# Altium PCB classyTKL_EC.PcbDoc (part 2 of 2)
Units mm, origin at the board's own origin, x right, y up, seen from the top; angles counter-clockwise.
Board outline 346.59 x 122.85 mm, 4 copper layers (Top Layer, Int1, Int2, Bottom Layer), stack 1.369 mm thick; 156 components, 68 nets, 789 pads, 1245 vias.
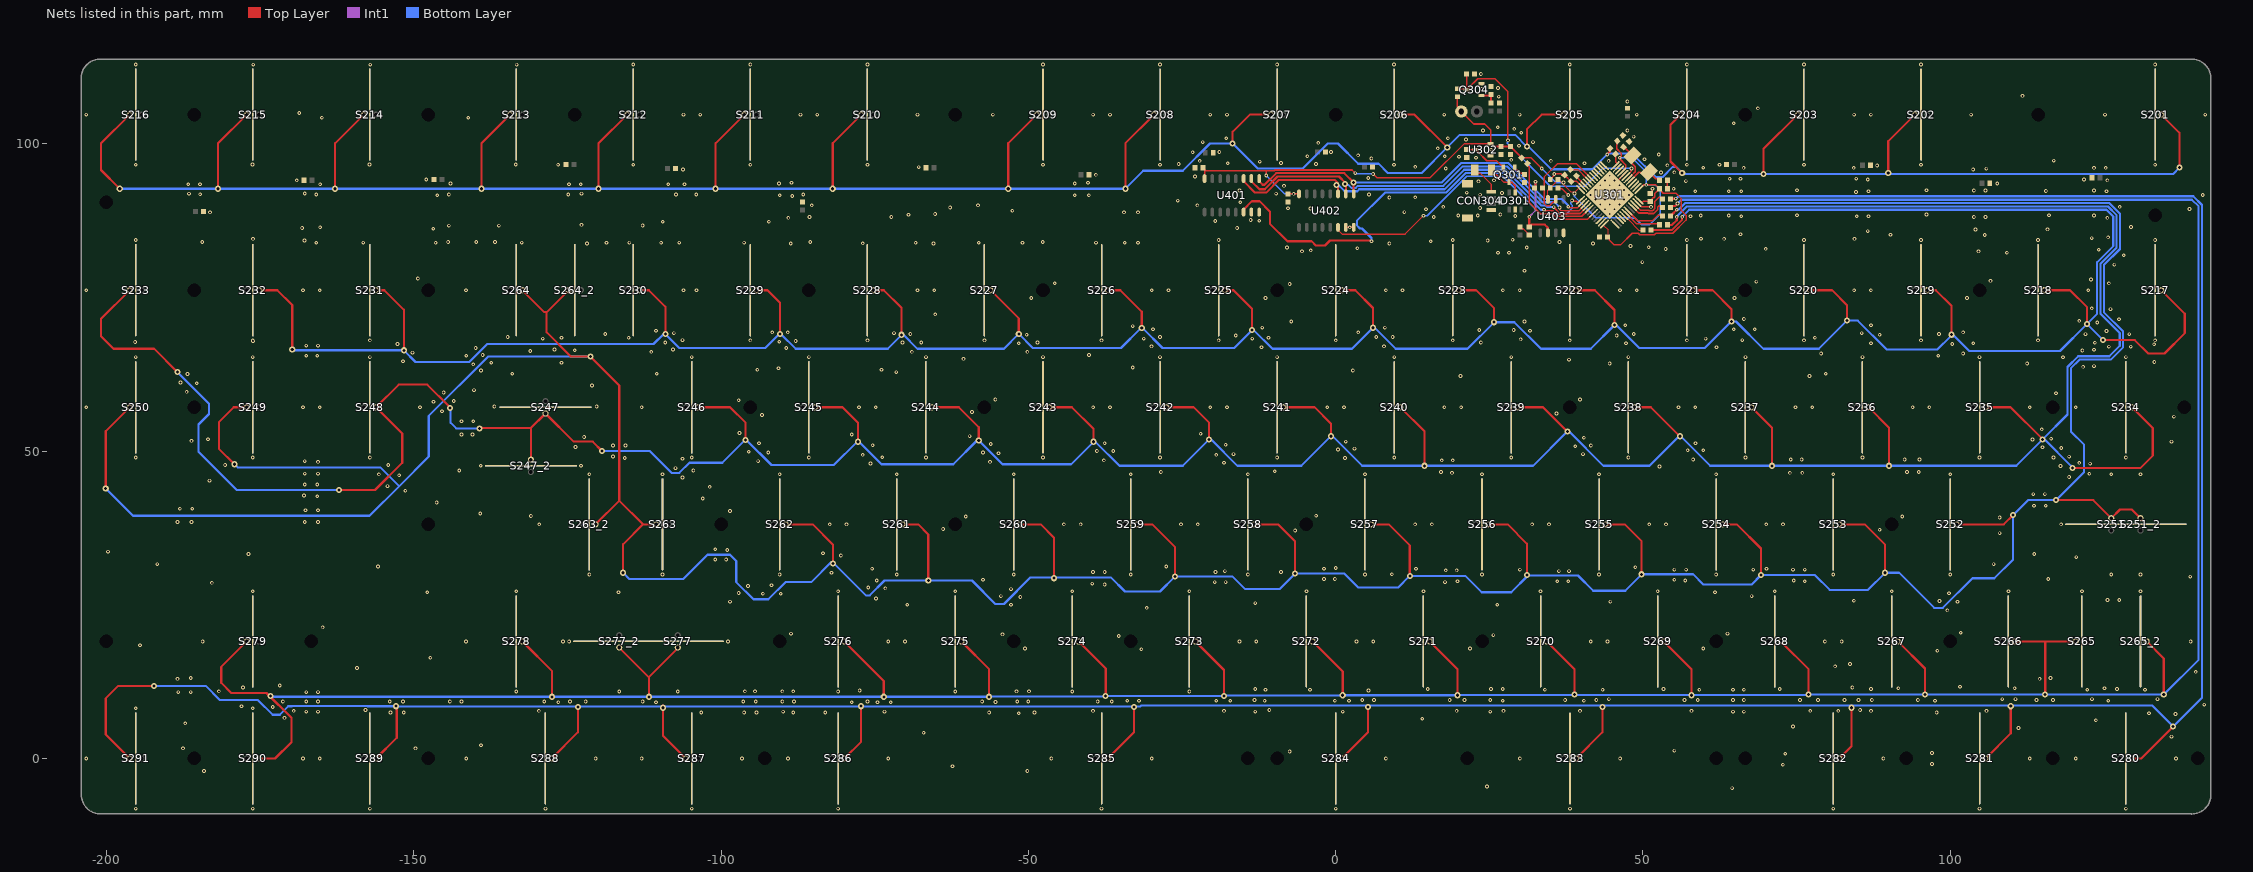
[diagram p4: the nets of this part, all layers, seen from the top]

## Via types
v1: diameter 0.6, hole 0.3, Top Layer to Bottom Layer, tented both sides, 1092 vias
v2: diameter 1, hole 0.5, Top Layer to Bottom Layer, tented both sides, 128 vias
v3: diameter 0.6, hole 0.3, Top Layer to Bottom Layer, tented bottom, 25 vias

## Nets (pads, with @x,y where several pads share a name; then routed paths per layer and width w, separated by ;. In a path a pad name is that pad's centre, name@x,y a point inside that pad or via, vN(x,y) a via of type N, cw(c..) or ccw(c..) an arc to the next point about the centre after c; other vN are vias at no path point) (continued)
GND: C301.1 C302.1 C304.2 C305.1 C306.1 C307.1 C308.1 C309.1 C310.1 C311.1 C312.1 C314.1 C401.1 C402.1 C403.2 C404.1 CON304.4 CON304.5 D301.2 Q304.2 R301.2 R307.2 R308.2 R315.2 R401.2 R402.2 R403.2 R404.2 R405.2 R406.2 R407.2 R408.2 R409.2 R410.2 R411.2 R412.2 R413.2 R414.2 R415.2 R416.2 R417.2 S201.3 S202.3 S203.3 S204.3 S205.3 S206.3 S207.3 S208.3 S209.3 S210.3 S211.3 S212.3 S213.3 S214.3 S215.3 S216.3 S217.3 S218.3 S219.3 S220.3 S221.3 S222.3 S223.3 S224.3 S225.3 S226.3 S227.3 S228.3 S229.3 S230.3 S231.3 S232.3 S233.3 S234.3 S235.3 S236.3 S237.3 S238.3 S239.3 S240.3 S241.3 S242.3 S243.3 S244.3 S245.3 S246.3 S247.3 S247_2.3 S248.3 S249.3 S250.3 S251.3 S251_2.3 S252.3 S253.3 S254.3 S255.3 S256.3 S257.3 S258.3 S259.3 S260.3 S261.3 S262.3 S263.3 S263_2.3 S264.3 S264_2.3 S265.3 S265_2.3 S266.3 S267.3 S268.3 S269.3 S270.3 S271.3 S272.3 S273.3 S274.3 S275.3 S276.3 S277.3 S277_2.3 S278.3 S279.3 S280.3 S281.3 S282.3 S283.3 S284.3 S285.3 S286.3 S287.3 S288.3 S289.3 S290.3 S291.3 U301.8 U301.23 U301.35 U301.47 U302.1 U401.7 U401.8 U402.7 U402.8 U403.4 | length 21.1
  Top Layer w0.254: U402.7@1.651,86.429 U402.8@2.921,86.429 ; C404.1@29.972,86.502 30.245,86.229 30.469,86.229 31.198,85.5 31.198,85.475 31.471,85.202 R417.2@31.496,85.202 ; C403.2@34.91,94.234 34.91,94.259 35.183,94.532 35.208,94.532 35.494,94.818 35.494,95.057 v1(35.56,95.123) 36.668,95.123 36.873,94.917 R315.2@37.259,94.917 C314.1@38.275,93.901 38.293,93.884 38.679,93.884 38.697,93.901 39.236,93.901 U301.23@40.026,93.111 ; C311.1@36.21,92.837 36.349,92.698 36.842,92.698 v1(37.846,91.694) ; v3(44.604,91.715) 44.604,92.775 U301.8@47.061,95.233 ; U301.47@49.183,90.318 49.195,90.318 49.625,89.889 49.645,89.889 49.745,89.788 51.281,89.788 v1(51.306,89.763) ; C309.1@51.181,91.963 51.206,91.963 51.479,92.236 51.479,92.533 51.562,92.616 v1(51.562,92.71) ; C308.1@53.99,92.71 C301.1@53.99,94.107
  other v1: -195.263,-8.161 -176.213,-8.161 -157.163,-8.161 -128.588,-8.161 -104.775,-8.161 -80.962,-8.161 -38.1,-8.161 0,-8.161 38.132,-8.161 80.962,-8.161 104.775,-8.161 128.587,-8.161 64.516,-4.826 24.638,-4.572 -184.15,-2.032 -50.165,-2.032 -62.357,-1.27 72.771,-1.016 97.028,-0.889 -203.327,0 -168.052,0 -165.324,0 -141.478,0 -120.426,0 -112.936,0 -96.614,0 -89.124,0 -72.801,0 -46.261,0 -29.939,0 8.161,0 29.971,0 46.293,0 89.124,0 112.936,0 120.426,0 136.748,0 73.152,0.762 97.028,0.889 -7.493,1.143 55.118,1.27 -187.579,1.651 -149.733,1.651 -139.089,2.144 136.017,3.556 -67.056,4.191 111.125,4.953 74.422,5.207 -187.198,5.715 123.698,6.223 14.097,6.477 -171.069,6.604 136.652,7.239 -51.562,7.366 132.334,7.366 -153.797,7.493 -151.638,7.493 -103.251,7.493 -96.266,7.493 -94.234,7.493 -88.265,7.493 -83.058,7.493 -56.388,7.493 -49.022,7.493 97.79,7.493 -167.513,7.62 -165.608,7.62 -89.916,7.62 -73.406,7.62 -13.081,7.62 1.143,7.62 25.146,7.62 64.643,7.62 66.421,7.62 -169.545,7.747 -129.667,7.747 -39.497,7.747 -18.161,7.747 19.685,7.747 27.305,7.747 39.751,7.747 57.912,7.747 77.216,7.747 81.788,7.747 87.122,7.747 105.918,7.747 -157.861,7.874 -10.795,7.874 85.344,7.874 -195.263,8.161 -176.213,8.161 -172.974,8.382 -178.054,8.509 141.351,8.763 -126.492,9.144 -110.617,9.144 -78.74,9.144 -74.549,9.144 -72.39,9.144 -55.358,9.179 -171.323,9.271 -167.513,9.271 -165.608,9.271 -153.924,9.271 -151.765,9.271 -144.145,9.271 -142.24,9.271 -128.778,9.271 -124.587,9.271 -122.047,9.271 -112.776,9.271 -96.393,9.271 -94.361,9.271 -90.043,9.271 -88.138,9.271 -76.2,9.271 -57.531,9.271 -51.816,9.271 -50.038,9.271 -38.735,9.271 -36.449,9.271 -33.909,9.398 -32.004,9.398 -19.431,9.398 -17.145,9.398 -11.557,9.398 -0.127,9.398 2.159,9.398 27.178,9.398 40.386,9.398 97.536,9.398 125.73,9.398 -13.208,9.525 4.318,9.525 6.223,9.525 18.542,9.525 20.955,9.525 25.146,9.525 37.338,9.525 42.418,9.525 56.769,9.525 58.928,9.525 64.643,9.525 66.421,9.525 75.565,9.525 78.486,9.525 82.804,9.525 85.09,9.525 87.249,9.525 94.742,9.525 114.046,9.525 116.713,9.525 44.45,9.652 108.458,9.652 110.617,9.652 123.063,9.652 133.731,9.652 -188.341,10.795 -186.309,10.795 -167.513,10.795 -165.608,10.795 -133.351,10.889 -116.581,10.889 -107.056,10.889 -80.963,10.889 -61.913,10.889 -42.862,10.889 -23.813,10.889 -181.737,10.922 -96.139,10.922 -94.488,10.922 -90.043,10.922 -88.265,10.922 -51.943,10.922 -49.911,10.922 -77.47,11.049 5.334,11.049 -11.43,11.176 -4.191,11.176 34.036,11.176 43.434,11.176 59.182,11.176 64.643,11.176 66.421,11.176 122.301,11.176 131.699,11.176 -13.081,11.303 14.986,11.303 25.273,11.303 27.178,11.303 53.34,11.303 72.263,11.303 87.122,11.303 127.127,11.303 91.567,11.43 110.49,11.43 125.095,11.43 -177.8,11.557 84.074,11.557 101.6,11.684 -171.83,11.885 -188.468,12.954 114.554,12.954 -186.309,13.081 116.332,13.081 139.954,14.097 -159.258,14.732 81.28,14.986 83.693,15.367 -147.32,16.383 97.917,17.526 -31.623,17.78 -50.546,17.907 21.844,17.907 59.817,17.907 -194.564,18.415 -184.374,19.05 -141.512,19.05 -125.73,19.05 -124.742,19.05 -98.894,19.05 -72.802,19.05 -70.074,19.05 -15.652,19.05 -12.924,19.05 3.398,19.05 6.126,19.05 41.498,19.05 44.226,19.05 79.598,19.05 82.326,19.05 139.129,19.05 -35.306,19.939 25.654,20.066 -54.229,20.193 -88.646,20.32 63.754,20.32 101.727,20.447 -164.846,21.336 99.535,24.097 -30.734,24.511 -69.723,25.019 -52.832,25.019 26.289,25.019 -13.081,25.273 101.186,25.494 -98.552,25.527 44.704,25.527 98.265,25.621 84.328,25.654 125.603,25.781 127.508,25.781 -74.803,26.035 -51.308,26.289 -54.483,26.416 67.691,26.416 -93.218,26.797 -90.297,26.797 99.789,26.891 -97.155,26.924 -147.828,27.051 -116.713,27.051 61.722,27.051 -176.213,27.211 -133.351,27.211 -80.963,27.211 -61.913,27.211 -42.862,27.211 -23.813,27.211 -4.763,27.211 14.287,27.211 33.337,27.211 52.387,27.211 71.437,27.211 90.487,27.211 109.479,27.211 121.443,27.211 130.968,27.211 -52.832,27.559 -73.279,27.686 -76.073,27.813 -95.631,28.067 -91.821,28.194 -37.592,28.321 -39.624,28.448 -182.88,28.575 -19.685,28.702 -17.907,28.702 17.78,28.702 19.812,28.829 36.068,28.829 37.846,28.829 76.327,28.829 -74.676,28.956 56.896,28.956 74.549,28.956 -57.404,29.083 55.118,29.083 -1.905,29.21 -0.127,29.21 115.951,29.21 139.065,29.591 -121.451,29.939 -109.544,29.939 -90.488,29.939 -71.438,29.939 -52.388,29.939 -33.338,29.939 -14.288,29.939 4.762,29.939 23.812,29.939 42.862,29.939 61.912,29.939 80.962,29.939 100.012,29.939 126.206,29.939 130.968,29.939 9.144,29.972 -82.042,30.226 -39.497,30.353 -37.592,30.353 -19.558,30.353 -8.89,30.353 -18.034,30.48 36.322,30.48 37.973,30.48 17.907,30.607 19.685,30.607 29.972,30.734 55.118,30.734 57.023,30.734 67.945,30.734 74.422,30.734 76.327,30.734 -75.438,30.861 -1.905,30.861 13.081,30.861 70.104,30.861 0,30.988 48.768,31.115 -155.829,31.242 -27.559,31.242 -191.77,31.623 107.061,31.623 -100.965,32.385 -99.187,32.385 120.523,32.766 -80.518,33.02 -176.911,33.274 113.665,33.274 -83.439,33.401 -199.771,33.655 -99.012,33.922 -100.965,34.036 108.044,36.67 -6.604,37.084 88.519,37.211 -63.881,37.338 -129.612,38.1 -82.327,38.1 -79.599,38.1 -44.227,38.1 -41.499,38.1 -25.177,38.1 -22.449,38.1 12.923,38.1 15.651,38.1 31.973,38.1 34.701,38.1 51.023,38.1 53.751,38.1 70.073,38.1 72.801,38.1 118.045,38.1 -188.468,38.481 -186.182,38.481 -167.767,38.481 -165.608,38.481 108.044,39.21 -60.198,39.37 92.202,39.37 -130.969,39.464 -3.175,39.497 -139.192,39.878 -98.552,40.259 -167.64,40.386 -165.608,40.386 -188.087,40.64 -186.055,40.64 113.632,41.115 115.537,41.115 -146.304,41.656 -102.997,42.291 -165.735,42.672 -167.894,42.799 113.505,43.02 115.41,43.02 -151.384,43.561 -101.854,44.196 -154.305,44.323 -167.767,44.577 -165.735,44.577 -183.261,45.212 -106.299,45.72 119.347,45.814 -152.4,46.101 -155.702,46.228 -121.451,46.261 -109.544,46.261 -90.488,46.261 -71.438,46.261 -52.388,46.261 -33.338,46.261 -14.288,46.261 4.762,46.261 23.812,46.261 42.862,46.261 61.912,46.261 80.962,46.261 100.012,46.261 126.206,46.261 130.968,46.261 122.649,46.322 -167.767,46.355 -165.608,46.355 18.923,46.482 73.914,46.482 75.946,46.482 -28.448,46.609 17.145,46.609 92.964,46.609 94.869,46.609 -9.906,46.736 -142.621,46.863 -104.521,46.863 -107.442,47.244 52.705,47.498 117.95,47.592 -139.13,47.625 -122.808,47.625 -180.721,47.752 -154.178,47.752 122.776,47.973 -75.692,48.006 120.998,48.1 -18.161,48.133 -165.608,48.26 -56.261,48.26 -167.767,48.387 -93.98,48.387 -37.719,48.514 17.272,48.514 19.05,48.514 58.166,48.641 74.041,48.641 75.819,48.641 92.583,48.641 94.996,48.641 -106.299,48.768 -115.697,48.895 1.524,48.895 -195.263,48.989 -176.213,48.989 -157.162,48.989 -104.776,48.989 -85.726,48.989 -66.676,48.989 -47.626,48.989 -28.576,48.989 -9.526,48.989 9.524,48.989 28.574,48.989 47.624,48.989 66.674,48.989 85.724,48.989 104.774,48.989 116.807,48.989 128.587,48.989 -73.787,49.022 119.347,49.116 -117.602,49.149 -76.962,49.403 -19.431,49.403 -16.637,49.53 40.259,49.53 -54.864,49.657 -92.329,49.784 -57.404,49.784 -95.504,49.911 -38.862,50.038 -36.195,50.038 57.277,50.165 59.817,50.165 0.381,50.292 3.048,50.419 118.077,50.513 115.029,50.64 -123.698,50.673 38.989,50.8 -117.602,50.927 -115.57,50.927 41.529,50.927 -75.351,50.969 -17.907,51.054 -56.134,51.181 -93.853,51.308 -37.592,51.308 58.547,51.308 1.651,51.562 136.017,51.562 -186.182,51.689 113.378,51.91 -183.515,51.943 116.426,52.037 40.386,52.197 -122.301,52.324 -59.563,52.451 -142.24,52.705 -140.462,52.705 -78.74,52.705 -21.971,52.832 -97.028,52.959 114.902,53.561 -142.24,54.864 -140.335,54.864 136.398,55.626 -93.345,55.88 35.941,56.134 -59.182,56.388 -145.415,56.515 -203.327,57.15 -168.052,57.15 -165.324,57.15 -149.001,57.15 -112.937,57.15 -77.564,57.15 -74.837,57.15 -39.464,57.15 -36.737,57.15 -20.414,57.15 -17.687,57.15 -1.364,57.15 1.363,57.15 17.686,57.15 20.413,57.15 55.786,57.15 58.513,57.15 74.836,57.15 77.563,57.15 93.886,57.15 96.613,57.15 112.936,57.15 120.426,57.15 -136.906,57.277 -120.269,57.277 -146.812,58.039 -143.51,58.166 -97.155,58.293 -55.372,58.42 39.751,58.42 117.221,59.436 -145.161,59.563 -186.977,59.657 -140.208,59.944 -121.031,60.706 -185.326,61.054 -187.993,61.181 20.32,62.23 77.089,62.23 -186.85,62.578 -133.985,62.611 -110.49,62.611 79.756,62.611 -71.501,62.865 -139.065,63.119 2.794,63.119 -94.107,63.246 -73.914,63.246 -90.678,63.5 -33.02,63.627 121.633,63.721 123.411,63.848 -140.335,64.135 44.577,64.262 112.522,64.262 -137.414,64.389 -125.984,64.389 133.223,64.516 -151.765,64.643 37.973,64.897 -60.579,65.024 118.364,65.278 -195.263,65.311 -176.213,65.311 -157.162,65.311 -104.776,65.311 -85.726,65.311 -66.676,65.311 -47.626,65.311 -28.576,65.311 -9.526,65.311 9.524,65.311 28.574,65.311 47.624,65.311 66.674,65.311 85.724,65.311 104.774,65.311 128.587,65.311 -167.513,65.532 -165.735,65.532 -141.478,65.532 98.044,65.532 -138.811,65.659 -40.132,65.659 78.994,65.913 102.108,65.913 -150.241,66.04 -111.379,66.167 -68.961,66.167 -50.165,66.167 -131.064,66.294 121.506,66.388 -123.825,66.421 123.411,66.515 -127.127,66.548 -107.823,66.548 -139.954,66.802 -89.408,66.802 -12.065,66.929 61.976,66.929 125.824,67.023 129.38,67.023 -29.972,67.056 7.874,67.056 -167.513,67.183 -165.608,67.183 133.19,67.404 -152.654,67.437 100.33,67.437 -51.562,67.564 47.244,67.564 87.122,67.564 103.759,67.564 123.538,67.658 -109.093,67.691 -70.485,67.691 -67.437,67.691 -48.514,67.691 23.622,67.691 -195.359,67.785 -90.551,67.818 -176.182,67.912 -87.884,67.945 -176.213,68.039 -157.162,68.039 -95.251,68.039 -76.201,68.039 -57.151,68.039 -38.101,68.039 -19.051,68.039 -0.001,68.039 19.049,68.039 38.099,68.039 57.149,68.039 76.199,68.039 95.249,68.039 114.299,68.039 133.349,68.039 -106.299,68.072 66.167,68.072 30.099,68.199 -129.032,68.326 -31.242,68.326 -13.589,68.326 60.198,68.326 -125.984,68.453 -115.062,68.453 -10.922,68.453 77.978,68.453 -134.747,68.58 -28.575,68.58 6.604,68.58 9.271,68.58 -16.256,68.834 45.72,68.834 -50.292,68.961 88.519,68.961 122.014,69.055 129.126,69.055 -118.872,69.088 -69.215,69.088 48.514,69.088 98.171,69.088 -107.696,69.215 -71.882,69.215 85.598,69.215 -91.694,69.342 -89.154,69.342 3.683,69.342 102.108,69.342 125.443,69.563 -110.617,69.596 31.623,69.596 23.368,69.723 28.956,69.723 -29.718,69.85 64.77,69.85 68.199,69.85 -11.938,70.104 8.001,70.104 -33.02,70.358 47.117,70.485 87.122,70.485 123.919,70.96 -7.239,71.12 30.734,71.12 120.998,71.214 127.475,71.468 66.421,71.501 -65.151,72.263 126.078,73.119 123.03,73.246 -49.53,74.93 -11.43,74.93 64.897,74.93 102.743,74.93 -203.327,76.2 -168.052,76.2 -165.324,76.2 -141.512,76.2 -106.139,76.2 -104.013,76.2 -68.039,76.2 -65.312,76.2 -29.939,76.2 -27.212,76.2 8.161,76.2 10.888,76.2 27.211,76.2 29.938,76.2 46.261,76.2 48.988,76.2 84.361,76.2 87.088,76.2 122.461,76.2 -7.493,77.216 125.824,77.31 -45.72,77.343 68.453,77.597 106.553,77.724 122.903,77.945 -149.352,78.105 30.734,79.375 126.713,80.358 49.911,80.772 128.237,81.882 26.416,82.296 28.194,82.296 109.22,82.296 -5.494,82.517 104.615,82.517 -4.064,82.677 124.173,82.771 53.688,82.898 69.977,82.931 3.523,83.025 -7.907,83.152 31.082,83.152 50.927,83.185 47.973,83.406 -121.826,83.787 -88.679,83.787 -65.438,83.787 8.73,83.787 41.877,83.787 -76.962,83.82 -165.895,83.914 -146.464,83.914 -118.651,83.914 -109.761,83.914 -68.359,83.914 -58.072,83.914 -50.96,83.914 -34.323,83.914 -32.164,83.914 -158.242,83.947 -132.461,83.947 -114.935,83.947 -106.807,83.947 -96.266,83.947 -38.989,83.947 -184.437,84.041 -144.432,84.041 -139.86,84.041 -136.812,84.041 -85.504,84.041 -47.658,84.041 36.416,84.041 15.461,84.168 -167.8,84.295 24.732,84.295 -195.263,84.361 -19.051,84.361 19.049,84.361 57.149,84.361 76.199,84.361 95.249,84.361 114.299,84.361 133.349,84.361 28.796,84.422 -176.182,84.549 63.213,84.549 84.422,84.549 59.436,84.582 123.03,84.676 125.697,84.803 105.631,85.184 90.297,85.217 65.88,85.311 86.581,85.819 104.107,86.073 115.824,86.106 -146.845,86.2 -168.181,86.327 -16.035,86.327 2.286,86.429 -165.26,86.454 129.413,86.487 -144.305,86.708 -136.177,86.708 -112.776,86.741 -122.715,86.835 -109.507,87.343 -92.235,87.343 -19.591,87.47 -12.446,87.503 -13.843,87.63 -89.06,87.978 125.57,87.978 -85.631,88.105 -72.296,88.105 15.969,88.105 103.853,88.105 105.758,88.105 57.752,88.232 66.007,88.232 84.803,88.232 86.708,88.232 29.21,88.265 19.944,88.346 23.119,88.346 59.403,88.359 63.975,88.359 123.411,88.359 75.057,88.392 116.078,88.392 -69.502,88.486 26.797,88.519 96.139,88.519 -65.184,88.613 -183.167,88.867 -34.45,88.867 -32.164,88.867 11.176,88.9 -52.611,89.121 14.699,89.375 138.938,89.408 -4.097,89.502 -7.747,89.535 23.5,89.591 -62.738,89.662 17.493,89.756 127.602,89.756 -85.25,90.01 -58.199,90.01 -22.512,90.01 -15.527,90.518 -25.687,90.772 8.73,91.28 12.954,91.313 -88.425,91.534 -146.21,91.661 -90.457,91.661 -42.451,91.661 -40.165,91.661 141.097,91.694 23.5,91.75 -165.895,91.788 -144.305,91.788 -124.874,91.788 -107.348,91.788 -104.046,91.788 -86.647,91.788 5.428,91.788 -184.785,91.821 -186.596,91.915 -122.715,91.915 -9.685,91.915 -167.767,91.948 27.056,92.004 21.336,92.075 84.676,92.169 58.514,92.296 63.975,92.296 66.007,92.296 86.708,92.296 125.443,92.296 115.57,92.329 -15.654,92.423 103.853,92.423 105.758,92.423 123.411,92.423 75.057,92.456 96.139,92.456 54.991,92.71 -8.415,93.185 -186.723,93.439 -184.818,93.439 -165.26,93.439 -124.747,93.439 -122.842,93.439 -108.618,93.439 -105.951,93.439 -144.051,93.566 -90.584,93.566 -42.451,93.566 107.663,93.566 -88.552,93.693 -40.292,93.693 23.246,93.909 56.99,93.947 -169.07,94.074 25.748,94.074 125.57,94.074 -147.988,94.201 86.581,94.201 121.76,94.201 64.102,94.328 65.88,94.328 84.709,94.361 5.301,94.455 -22.893,94.709 -39.022,94.963 52.926,95.344 55.118,95.377 -106.205,95.852 103.726,95.852 105.885,95.979 17.907,96.012 66.388,96.106 84.295,96.106 123.411,96.106 125.316,96.106 59.817,96.139 -67.851,96.233 12.954,96.266 88.105,96.487 53.975,96.52 -195.263,96.614 -126.525,96.614 -114.301,96.614 -95.251,96.614 -76.201,96.614 -47.626,96.614 -28.576,96.614 9.494,96.614 57.149,96.614 62.451,96.614 76.199,96.614 95.249,96.614 133.349,96.614 -176.276,96.647 -157.225,96.647 -133.413,96.647 -25.56,96.741 -3.208,96.741 -17.559,96.868 40.48,96.868 -8.89,96.901 -12.352,97.122 -22.131,97.249 35.019,97.249 44.417,97.249 116.84,97.282 28.575,97.409 50.259,97.503 5.809,97.63 22.827,97.757 20.066,97.917 -4.605,98.011 17.747,98.011 3.65,98.138 52.578,98.298 -23.274,98.646 -18.923,98.679 -0.762,98.679 25.273,99.06 16.604,99.281 29.845,99.695 -2.827,100.17 -21.623,100.297 32.098,100.297 21.209,100.711 -17.813,100.932 18.255,100.932 48.481,101.186 30.193,101.821 23.97,102.202 47.465,102.202 29.05,102.456 26.383,102.71 64.77,103.378 -164.972,104.267 -141.16,104.267 -203.327,104.775 -106.139,104.775 -103.412,104.775 -87.089,104.775 -84.362,104.775 -68.039,104.775 -55.787,104.775 -39.464,104.775 -36.737,104.775 -20.414,104.775 -17.687,104.775 17.656,104.775 29.938,104.775 48.988,104.775 84.361,104.775 87.088,104.775 103.411,104.775 125.188,104.775 141.511,104.775 -168.656,105.029 68.707,105.791 47.465,106.901 26.543,107.696 111.76,107.823 23.749,108.966 26.416,109.093 23.622,111.379 -176.149,112.903 -157.098,112.903 -133.286,112.903 -195.263,112.936 -114.301,112.936 -95.251,112.936 -76.201,112.936 -47.626,112.936 -28.576,112.936 -9.526,112.936 9.494,112.936 38.099,112.936 57.149,112.936 76.199,112.936 95.249,112.936 133.349,112.936
  other v3: 44.604,88.604 43.826,89.381 45.382,89.381 43.048,90.159 44.604,90.159 46.16,90.159 42.271,90.937 43.826,90.937 45.382,90.937 46.938,90.937 41.493,91.715 43.048,91.715 46.16,91.715 47.715,91.715 42.271,92.493 43.826,92.493 45.382,92.493 46.938,92.493 43.048,93.271 44.604,93.271 46.16,93.271 43.826,94.048 45.382,94.048 44.604,94.826
MUX_EN_1: U301.29 U401.6 | length 75.1
  Top Layer w0.254: v1(33.909,89.281) 34.003,89.281 34.187,89.097 35.427,89.097 36.291,88.233 40.062,88.233 U301.29@41.086,89.258
  Top Layer w0.35: U401.6@-14.986,88.911 -14.986,89.336 -13.644,90.678 -12.377,90.678 -10.71,89.011 -10.71,87.021 -7.848,84.159 -3.913,84.159 -3.229,83.475 -1.727,83.475 -0.915,84.286 5.649,84.286 5.774,84.161 v1(5.842,84.161)
  Bottom Layer w0.35: v1(5.842,84.161) 5.842,84.693 4.288,86.247 3.956,86.247 3.443,86.76 3.443,87.484 8.035,92.076 17.955,92.076 21.13,95.251 27.415,95.251 33.385,89.281 v1(33.909,89.281)
MUX_EN_2: U301.25 U402.6 | length 48.4
  Top Layer w0.254: U402.6@0.381,86.429 0.381,86.004 1.047,85.338 11.297,85.338 v1@14.224,88.265 ; v1(38.481,90.805) 38.614,90.672 39.132,90.672 39.387,90.417 39.417,90.417 U301.25@39.672,90.672
  Bottom Layer w0.254: v1(14.282,88.313) 14.903,88.313 21.338,94.749 27.171,94.749 33.266,88.654 37.598,88.654 38.473,89.529 38.473,90.05 38.25,90.273 38.25,90.483 38.481,90.714 v1(38.481,90.805)
MUX_SEL_0: U301.28 U401.11 U402.11 | length 65
  Top Layer w0.254: v1(35.474,89.722) 35.474,89.692 36.479,88.687 39.809,88.687 U301.28@40.733,89.611
  Top Layer w0.35: U401.11@-14.986,94.361 -14.986,93.936 -13.125,92.075 -11.303,92.075 -9.228,94.15 -0.17,94.15 v2@0.381,93.599 ; U402.11@0.381,91.879 v2@0.381,93.345
  Bottom Layer w0.35: v2(0.127,93.345) 0.303,93.345 0.534,93.113 0.645,93.113 1.458,92.301 3.511,92.301 3.836,92.626 17.728,92.626 20.903,95.801 27.643,95.801 33.488,89.956 34.189,89.956 34.386,89.758 35.438,89.758 v1(35.474,89.722)
MUX_SEL_1: U301.27 U401.10 U402.10 | length 63.2
  Top Layer w0.254: v1@36.361,89.447 36.667,89.141 39.588,89.141 39.95,89.503 39.95,89.523 40.379,89.952 U301.27@40.379,89.965
  Top Layer w0.35: U401.10@-13.716,94.361 -13.634,94.279 -13.634,93.854 -12.405,92.625 -11.531,92.625 -9.456,94.7 0.55,94.7 v2@1.651,93.599 ; U402.10@1.651,91.879 v2@1.651,93.472
  Bottom Layer w0.35: v2(1.524,93.472) 1.648,93.348 2.062,93.348 2.559,92.851 3.283,92.851 3.608,93.176 17.5,93.176 20.675,96.351 27.871,96.351 33.716,90.506 35.645,90.506 36.149,90.002 36.149,89.992 36.449,89.692 v1(36.449,89.662)
MUX_SEL_2: U301.26 U401.9 U402.9 | length 60.9
  Top Layer w0.254: v1@38.001,89.595 39.303,89.595 U301.26@40.026,90.318
  Top Layer w0.35: U401.9@-12.446,94.361 -12.364,94.279 -12.364,93.854 -11.867,93.357 -11.577,93.357 -9.684,95.25 1.397,95.25 v2(2.921,93.726) U402.9@2.921,91.879
  Bottom Layer w0.35: v2(2.921,93.726) 17.272,93.726 20.447,96.901 28.099,96.901 33.944,91.056 36.757,91.056 37.798,90.015 37.798,89.837 v1(37.846,89.789)
NetC301_2: C301.2 U301.5 X301.1 | length 5.8
  Top Layer w0.254: U301.5@48.122,94.172 49.327,95.377 49.537,95.377 49.695,95.218 50.788,95.218 X301.1@51.001,95.43 52.079,94.352 52.445,94.352 C301.2@52.69,94.107
NetC302_2: C302.2 U301.6 X301.2 | length 6.4
  Top Layer w0.254: C302.2@46.833,99.469 46.962,99.469 X301.2@48.313,98.118 48.16,97.964 48.16,96.871 48.76,96.272 48.76,95.485 48.216,94.941 48.184,94.941 U301.6@47.768,94.526
NetC303_2: C303.2 Q304.1 R308.1 | length 3
  Top Layer w0.254: Q304.1@23.736,107.889 25.085,107.889 R308.1@25.273,108.077 C303.2@25.273,106.695
NetC314_2: C314.2 U301.22 | length 1.8
  Top Layer w0.254: C314.2@39.195,94.821 39.195,94.649 U301.22@40.379,93.465
NetCON304_1: CON304.1 F301.2 | length 4.8
  Top Layer w0.254: F301.2@22.653,95.758 22.653,95.733 23.126,95.26 23.485,95.26 25.344,93.401 CON304.1@25.344,92.24
NetQ301_1: Q301.1 R301.1 | length 2.2
  Top Layer w0.254: Q301.1@29.144,96.196 29.144,95.971 29.292,95.823 29.517,95.823 30.104,95.236 30.509,95.236 R301.1@30.734,95.011
NetR201_1: R201.1 U301.12 | length 1.9
  Top Layer w0.254: R201.1@45.545,98.346 45.527,98.329 45.527,97.943 45.545,97.925 45.545,97.085 45.8,96.83 45.8,96.8 U301.12@45.647,96.647
NetR202_1: R202.1 U301.41 | length 3.9
  Top Layer w0.203: U301.41@47.061,88.197 47.087,88.197 47.542,87.742 47.585,87.742 49.348,85.979 R202.1@50.023,85.979
NetR203_1: R203.1 U301.42 | length 5.9
  Top Layer w0.254: U301.42@47.415,88.551 48.916,87.049 52.617,87.049 R203.1@52.69,87.122
NetR204_1: R204.1 U301.43 | length 6.4
  Top Layer w0.254: U301.43@47.768,88.904 49.169,87.503 51.562,87.503 52.452,88.393 53.072,88.393 R204.1@53.198,88.519
NetR205_1: R205.1 U301.45 | length 5.9
  Top Layer w0.254: U301.45@48.476,89.611 49.322,88.765 50.775,88.765 50.858,88.682 51.754,88.682 51.837,88.765 51.847,88.765 52.397,89.315 52.397,89.735 52.566,89.904 53.186,89.904 R205.1@53.198,89.916
NetR206_1: R206.1 U301.46 | length 6.3
  Top Layer w0.254: U301.46@48.829,89.965 48.842,89.965 49.271,89.535 49.291,89.535 49.607,89.219 50.963,89.219 51.046,89.136 51.566,89.136 51.649,89.219 51.659,89.219 51.933,89.493 51.933,89.906 51.943,89.916 51.943,90.678 52.566,91.301 53.186,91.301 R206.1@53.198,91.313
NetR315_1: R315.1 U301.20 | length 3.6
  Top Layer w0.203: U301.20@40.832,94.426 U301.20@41.086,94.172
  Top Layer w0.254: R315.1@38.179,95.837 38.196,95.819 38.582,95.819 38.6,95.837 39.422,95.837 U301.20@40.832,94.426
NetR316_2: R316.2 U301.31 | length 18.2
  Top Layer w0.254: R316.2@31.194,96.822 31.194,96.533 31.496,96.231 31.496,90.486 33.339,88.643 35.239,88.643 36.103,87.779 41.01,87.779 41.781,88.551 U301.31@41.793,88.551
NetR417_1: R417.1 R418.1 U403.2 | length 13.1
  Top Layer w0.254: R418.1@32.37,92.837 32.512,92.979 v1(32.512,93.853)
  Top Layer w0.35: v1(31.496,88.138) R417.1@31.496,86.502 31.521,86.502 31.887,86.868 34.036,86.868 34.508,86.396 34.508,85.576 U403.2@34.544,85.54
  Int1 w0.254: v1(31.496,88.138) 32.512,89.154 v1(32.512,93.853)
NetR418_2: R418.2 U301.19 U403.6 | length 16.3
  Top Layer w0.254: U403.6@35.814,90.99 35.814,90.71 35.654,90.55 35.374,90.55 35.171,90.347 35.171,90.305 34.779,89.913 34.309,89.913 33.917,90.305 33.917,94.623 36.041,96.747 39.218,96.747 U301.19@41.44,94.526
NetU301_2: U301.2
NetU301_3: U301.3
NetU301_4: U301.4
NetU301_10: U301.10
NetU301_11: U301.11
NetU301_13: U301.13
NetU301_14: U301.14
NetU301_15: U301.15
NetU301_16: U301.16
NetU301_17: U301.17
NetU301_18: U301.18
NetU301_21: U301.21
NetU301_39: U301.39
NetU301_40: U301.40
NRST: C304.1 Q304.3 R306.2 U301.7 | length 46.7
  Top Layer w0.203: R306.2@19.812,108.981 21.194,108.981 Q304.3@21.321,108.854
  Top Layer w0.254: C304.1@21.321,111.379 21.321,108.854 Q304.3@21.336,108.839 21.561,108.839 21.709,108.987 21.709,109.212 23.114,110.617 25.908,110.617 28.032,108.493 v1(28.032,100.584) ; U301.7@47.415,94.879 48.122,95.586 48.122,96.001 v1(48.133,96.012)
  Bottom Layer w0.254: v1(28.032,100.584) 27.966,100.518 27.966,100.273 27.96,100.267 27.96,100.056 34.917,93.099 40.521,93.099 43.434,96.012 v1(48.133,96.012)
RAW: D301.5 F301.1 Q301.3 | length 6.2
  Top Layer w0.254: F301.1@25.353,95.758 25.353,95.466 25.826,94.993 26.118,94.993 27.315,93.796 Q301.3@28.194,93.796 28.263,93.727 28.701,93.727 29.215,93.213 D301.5@29.215,92.109
row1: R201.2 S201.1 S202.1 S203.1 S204.1 S205.1 S206.1 S207.1 S208.1 S209.1 S210.1 S211.1 S212.1 S213.1 S214.1 S215.1 S216.1 | length 553.7
  Top Layer w0.35: v2(-197.866,92.71) -200.914,95.758 -200.914,100.124 S216.1@-196.263,104.775 ; v2(-181.864,92.71) -181.864,100.124 S215.1@-177.213,104.775 ; v2(-162.813,92.71) -162.813,100.124 S214.1@-158.163,104.775 ; v2(-139.001,92.71) -139.001,100.124 S213.1@-134.351,104.775 ; v2(-119.951,92.71) -119.951,100.124 S212.1@-115.301,104.775 ; v2(-100.901,92.71) -100.901,100.124 S211.1@-96.251,104.775 ; v2(-81.852,92.71) -81.852,100.124 S210.1@-77.201,104.775 ; v2(-53.276,92.71) -53.276,100.124 S209.1@-48.626,104.775 ; v2(-34.227,92.71) -34.227,100.124 S208.1@-29.576,104.775 ; v2(-16.764,100.076) -16.764,101.981 -13.97,104.775 S207.1@-10.526,104.775 ; S206.1@10.495,104.775 12.827,104.775 v2(18.161,99.441) ; v2(31.115,99.568) 31.115,102.38 33.51,104.775 S205.1@37.099,104.775 ; v1(44.196,98.298) 44.608,98.71 44.608,99.248 R201.2@44.625,99.266 ; S204.1@56.149,104.775 54.483,103.109 54.483,97.155 v2(56.388,95.25) ; v2(69.596,95.123) 69.596,99.172 S203.1@75.199,104.775 ; v2(89.916,95.25) 89.916,100.442 S202.1@94.249,104.775 ; S201.1@134.35,104.775 137.287,101.838 v2(137.287,96.139)
  Bottom Layer w0.35: v2(-197.866,92.71) v2(-162.813,92.71) v2(-139.001,92.71) v2(-119.951,92.71) v2(-100.901,92.71) v2(-81.852,92.71) v2(-53.276,92.71) v2(-34.227,92.71) -31.305,95.631 -24.892,95.631 -20.447,100.076 v2(-16.764,100.076) -12.7,96.012 -5.334,96.012 -1.27,100.076 0.381,100.076 3.683,96.774 6.985,96.774 8.509,95.25 13.97,95.25 v2(18.161,99.441) 20.193,101.473 29.21,101.473 v2(31.115,99.568) ; v2@31.496,99.441 35.052,95.885 41.783,95.885 v1(44.196,98.298) 44.264,98.298 44.391,98.425 48.26,98.425 52.07,94.615 53.213,94.615 54.864,96.266 55.372,96.266 56.512,95.126 56.915,95.126 56.918,95.123 v2(69.596,95.123) 136.271,95.123 v2(137.287,96.139)
row2: R202.2 S217.1 S218.1 S219.1 S220.1 S221.1 S222.1 S223.1 S224.1 S225.1 S226.1 S227.1 S228.1 S229.1 S230.1 S231.1 S232.1 | length 603.5
  Top Layer w0.35: S232.1@-175.213,76.2 -172.212,76.2 -169.799,73.787 v2(-169.799,66.548) ; S231.1@-156.162,76.2 -154.813,76.2 -151.638,73.025 v2(-151.638,66.421) ; S230.1@-113.3,76.2 -111.76,76.2 -109.075,73.515 v2(-109.075,69.07) ; S229.1@-94.25,76.2 -92.456,76.2 -90.424,74.168 v2(-90.424,69.07) ; S228.1@-75.2,76.2 -73.533,76.2 -70.63,73.297 v2(-70.63,68.943) ; S227.1@-56.15,76.2 -51.562,71.612 v2(-51.562,69.088) ; S226.1@-37.1,76.2 -35.052,76.2 -31.559,72.707 v2(-31.559,70.023) ; S225.1@-18.05,76.2 -16.637,76.2 -13.607,73.17 v2(-13.607,69.705) ; S224.1@1,76.2 3.175,76.2 6.078,73.297 v2(6.078,70.086) ; S223.1@20.05,76.2 22.86,76.2 25.781,73.279 v2(25.781,70.993) ; S222.1@39.1,76.2 42.164,76.2 45.385,72.979 v2(45.385,70.531) ; R202.2@51.323,85.979 54.662,85.979 56.371,87.688 56.371,88.121 v1(56.388,88.138) ; S221.1@58.15,76.2 61.341,76.2 64.389,73.152 v2(64.389,71.12) ; S220.1@77.2,76.2 80.789,76.2 83.185,73.804 v2(83.185,71.247) ; S219.1@96.25,76.2 97.663,76.2 100.203,73.66 v2(100.203,68.961) ; S218.1@115.3,76.2 119.507,76.2 122.283,73.424 v2(122.283,70.721) ; v2(124.841,68.072) 130.048,68.072 132.207,65.913 134.874,65.913 138.176,69.215 138.176,72.374 S217.1@134.35,76.2
  Bottom Layer w0.35: v2@-169.545,66.548 -169.418,66.421 v2(-151.638,66.421) -149.733,64.516 -140.97,64.516 -138.049,67.437 -110.998,67.437 -109.365,69.07 v2(-109.075,69.07) -106.807,66.802 -92.837,66.802 -90.569,69.07 v2(-90.424,69.07) -90.279,69.07 -87.884,66.675 -72.898,66.675 v2(-70.63,68.943) -70.34,68.943 -68.072,66.675 -53.975,66.675 v2(-51.562,69.088) -49.276,66.802 -34.925,66.802 -31.704,70.023 v2(-31.559,70.023) -31.415,70.023 -28.194,66.802 -16.51,66.802 v2(-13.607,69.705) -13.317,69.705 -10.287,66.675 2.667,66.675 v2(6.078,70.086) 6.368,70.086 9.779,66.675 21.463,66.675 v2(25.781,70.993) 29.083,70.993 33.401,66.675 41.529,66.675 v2(45.385,70.531) 45.674,70.531 49.403,66.802 60.071,66.802 v2(64.389,71.12) 65.151,71.12 69.596,66.675 78.613,66.675 v2(83.185,71.247) 84.963,71.247 89.662,66.548 97.917,66.548 100.076,68.707 100.711,68.707 103.124,66.294 117.856,66.294 v2(122.283,70.721) ; v1(56.388,88.138) 57.531,89.281 125.444,89.281 126.535,88.19 126.535,83.371 123.91,80.746 123.91,72.348 v2(122.283,70.721) ; v2(124.841,68.072) 124.841,68.118 122.283,70.675 v2(122.283,70.721)
row3: R203.2 S233.1 S234.1 S235.1 S236.1 S237.1 S238.1 S239.1 S240.1 S241.1 S242.1 S243.1 S244.1 S245.1 S246.1 S247.1 S247_2.1 S248.1 | length 687.9
  Top Layer w0.35: S233.1@-196.263,76.2 -200.914,71.549 -200.914,68.707 -198.882,66.675 -192.278,66.675 v2(-188.468,62.865) ; v2(-162.179,43.688) -156.337,43.688 -151.892,48.133 -151.892,52.88 S248.1@-156.162,57.15 -152.479,60.833 -147.828,60.833 v2@-144.272,57.277 ; v2@-138.938,53.848 -138.859,53.769 -130.969,53.769 ; S247_2.1@-130.969,48.625 -130.969,53.769 ; v2(-119.38,50.038) -120.904,51.562 -124,51.562 S247.1@-128.588,56.15 -130.969,53.769 ; S246.1@-103.775,57.15 -98.552,57.15 -96.012,54.61 v2(-96.012,51.798) ; S245.1@-84.725,57.15 -80.264,57.15 -77.724,54.61 v2(-77.724,51.544) ; S244.1@-65.675,57.15 -61.341,57.15 -58.085,53.894 v2(-58.085,51.735) ; S243.1@-46.625,57.15 -42.926,57.15 -39.388,53.612 v2(-39.388,51.544) ; S242.1@-27.575,57.15 -23.114,57.15 -20.592,54.628 v2(-20.592,51.925) ; S241.1@-8.525,57.15 -3.429,57.15 -0.78,54.501 v2(-0.78,52.433) ; S240.1@10.525,57.15 14.478,53.197 v2(14.478,47.625) ; S239.1@29.575,57.15 33.746,57.15 v2(37.701,53.195) ; S238.1@48.625,57.15 51.29,57.15 v2(56.007,52.433) ; R203.2@53.99,86.868 54.053,86.805 54.71,86.805 55.499,87.594 v1(55.499,88.138) ; S237.1@67.675,57.15 70.993,53.832 v2(70.993,47.625) ; S236.1@86.725,57.15 90.043,53.832 v2(90.043,47.625) ; S235.1@105.775,57.15 109.819,57.15 v2(115.044,51.925) ; v2(119.888,47.244) 130.937,47.244 132.969,49.276 132.969,53.768 S234.1@129.587,57.15
  Bottom Layer w0.35: v2(-188.468,62.865) -183.348,57.745 -183.348,56.047 -185.039,54.356 -185.039,49.911 -178.816,43.688 v2(-162.179,43.688) ; v2(-144.145,57.023) -144.018,56.896 -144.018,54.61 -143.129,53.721 v2(-139.319,53.721) ; v2(-119.38,50.038) -111.633,50.038 -108.077,46.482 -106.807,46.482 -105.156,48.133 -99.822,48.133 -96.157,51.798 v2(-96.012,51.798) -95.867,51.798 -91.821,47.752 -81.661,47.752 -77.869,51.544 v2(-77.724,51.544) -77.579,51.544 -73.914,47.879 -62.23,47.879 -58.374,51.735 v2(-58.085,51.735) -54.229,47.879 -43.053,47.879 v2(-39.388,51.544) -39.098,51.544 -35.179,47.625 -24.892,47.625 v2(-20.592,51.925) -20.302,51.925 -16.002,47.625 -5.588,47.625 v2(-0.78,52.433) -0.49,52.433 4.318,47.625 v2(14.478,47.625) 32.131,47.625 v2(37.701,53.195) 37.991,53.195 43.561,47.625 51.054,47.625 55.862,52.433 v2(56.007,52.433) 56.152,52.433 60.96,47.625 v2(70.993,47.625) v2(90.043,47.625) 110.744,47.625 v2(115.044,51.925) ; v1(55.499,88.138) 55.499,88.204 57.126,89.831 125.672,89.831 127.085,88.418 127.085,83.143 124.46,80.518 124.46,72.374 127.593,69.241 127.593,67.157 125.883,65.447 120.819,65.447 119.084,63.712 119.084,55.965 v2(115.044,51.925) ; v2@119.634,47.625 115.334,51.925 v2(115.044,51.925)
row4: R204.2 S249.1 S250.1 S251.1 S251_2.1 S252.1 S253.1 S254.1 S255.1 S256.1 S257.1 S258.1 S259.1 S260.1 S261.1 S262.1 S263.1 S263_2.1 S264.1 S264_2.1 | length 784
  Top Layer w0.35: v2(-200.152,43.942) -200.152,53.261 S250.1@-196.263,57.15 ; v2(-179.197,47.879) -181.737,50.419 -181.737,54.737 -179.324,57.15 S249.1@-177.213,57.15 ; S264.1@-132.35,76.2 -128.779,72.629 -128.397,72.629 ; S264_2.1@-124.826,76.2 -128.397,72.629 ; S263_2.1@-120.451,38.1 -116.586,41.965 ; v2(-115.951,30.226) -115.951,34.87 -112.721,38.1 ; S263.1@-110.544,38.1 -112.721,38.1 ; S262.1@-89.488,38.1 -85.09,38.1 -81.788,34.798 v2(-81.788,31.75) ; S261.1@-70.438,38.1 -67.945,38.1 -66.294,36.449 v2(-66.294,28.956) ; S260.1@-51.388,38.1 -48.006,38.1 -45.847,35.941 v2(-45.847,29.337) ; S259.1@-32.338,38.1 -29.83,38.1 -26.162,34.432 v2(-26.162,29.591) ; S258.1@-13.288,38.1 -9.398,38.1 -6.604,35.306 v2(-6.604,30.099) ; S257.1@5.762,38.1 8.636,38.1 12.065,34.671 v2(12.065,29.718) ; S256.1@24.812,38.1 27.979,38.1 31.115,34.964 v2(31.115,29.845) ; S255.1@43.862,38.1 47.029,38.1 49.784,35.345 v2(49.784,29.972) ; R204.2@54.498,88.265 54.498,88.29 54.723,88.515 54.733,88.515 v1(55.499,89.281) ; S254.1@62.912,38.1 65.278,38.1 69.215,34.163 v2(69.215,29.845) ; S253.1@81.962,38.1 86.106,38.1 89.408,34.798 v2(89.408,30.226) ; S252.1@101.012,38.1 108.712,38.1 v2(110.236,39.624) ; v2(117.221,42.037) 123.269,42.037 S251.1@126.206,39.1 127.619,40.513 129.555,40.513 S251_2.1@130.968,39.1 ; -128.397,72.629 -128.397,69.342 -124.46,65.405 v2(-121.285,65.405) -116.586,60.706 -116.586,41.965 ; -116.586,41.965 -112.721,38.1
  Bottom Layer w0.35: v2@-200.025,43.815 -195.707,39.497 -157.226,39.497 -152.4,44.323 ; v2(-179.197,47.879) -178.689,47.371 -155.448,47.371 -152.4,44.323 ; v2(-121.285,65.405) -137.922,65.405 -147.574,55.753 -147.574,49.149 -152.4,44.323 ; v2(-115.951,30.226) -114.935,29.21 -106.172,29.21 -102.235,33.147 -98.552,33.147 -97.536,32.131 -97.536,28.702 -94.742,25.908 -92.329,25.908 -89.535,28.702 -85.344,28.702 -82.123,31.923 -81.834,31.923 -76.454,26.543 -75.819,26.543 -73.406,28.956 v2(-66.294,28.956) -59.182,28.956 -55.372,25.146 -53.975,25.146 -49.657,29.464 -36.576,29.464 -34.29,27.178 -28.575,27.178 v2(-26.162,29.591) -16.764,29.591 -14.732,27.559 -9.144,27.559 v2(-6.604,30.099) 1.397,30.099 3.683,27.813 10.16,27.813 v2(12.065,29.718) 21.082,29.718 23.749,27.051 28.575,27.051 31.305,29.781 39.433,29.781 41.91,27.305 47.117,27.305 v2(49.784,29.972) 58.166,29.972 59.817,28.321 67.691,28.321 v2(69.215,29.845) 77.978,29.845 80.391,27.432 86.614,27.432 v2(89.408,30.226) 91.694,30.226 97.409,24.511 98.806,24.511 103.632,29.337 107.188,29.337 110.236,32.385 v2(110.236,39.624) 112.649,42.037 v2(117.221,42.037) 121.793,46.609 121.793,51.054 119.634,53.213 119.634,63.484 121.047,64.897 126.111,64.897 128.143,66.929 128.143,69.469 125.01,72.602 125.01,80.29 127.635,82.915 127.635,88.646 127.381,88.9 125.9,90.381 56.899,90.381 55.846,89.329 55.547,89.329 v1(55.499,89.281)
  other v1: -125.189,76.2
row5: R205.2 S265.1 S265_2.1 S266.1 S267.1 S268.1 S269.1 S270.1 S271.1 S272.1 S273.1 S274.1 S275.1 S276.1 S277.1 S277_2.1 S278.1 S279.1 S290.1 | length 671.3
  Top Layer w0.35: S279.1@-177.213,19.05 -181.356,14.907 -181.356,12.319 -179.705,10.668 -173.99,10.668 -169.926,6.604 -169.926,2.667 -172.593,0 S290.1@-175.213,0 ; S278.1@-132.176,18.923 -132.176,18.876 -127.508,14.208 v2(-127.508,10.033) ; S277_2.1@-116.406,17.923 -116.406,17.876 -111.76,13.229 ; v2(-111.76,10.033) -111.76,13.229 ; S277.1@-107.056,18.05 -107.056,17.934 -111.76,13.229 ; S276.1@-79.789,18.923 -79.789,18.876 -73.533,12.62 v2(-73.533,10.033) ; S275.1@-60.739,18.923 -60.739,18.876 -56.388,14.525 v2(-56.388,10.033) ; S274.1@-41.688,18.923 -37.417,14.652 -37.417,10.208 v2(-37.465,10.16) ; S273.1@-22.639,18.923 -22.639,18.876 -18.161,14.398 v2(-18.161,10.16) ; S272.1@-3.589,18.923 -3.589,18.876 1.143,14.144 v2(1.143,10.287) ; S271.1@15.461,18.923 15.461,18.876 19.812,14.525 v2(19.812,10.287) ; S270.1@34.511,18.923 34.511,18.876 38.862,14.525 v2(38.862,10.414) ; S269.1@53.561,18.923 53.561,18.876 57.912,14.525 v2(57.912,10.287) ; R205.2@54.498,89.916 55.245,89.916 v1(55.626,90.297) ; S268.1@72.611,18.923 72.611,18.876 76.962,14.525 v2(76.962,10.414) ; S267.1@91.487,19.05 95.885,14.652 v2(95.885,10.414) ; S266.1@110.479,19.05 115.461,19.05 ; v2(115.443,10.414) 115.461,10.432 115.461,19.05 ; S265.1@120.443,19.05 115.461,19.05 ; S265_2.1@131.968,19.05 134.747,16.271 v2(134.747,10.414)
  Bottom Layer w0.35: v2@-173.356,10.159 -173.233,10.036 -172.828,10.036 -172.825,10.033 v2(-127.508,10.033) v2(-56.388,10.033) -56.325,10.096 -37.529,10.096 v2(-37.465,10.16) v2(-18.161,10.16) -18.098,10.223 1.079,10.223 v2(1.143,10.287) v2(19.812,10.287) 19.875,10.351 38.798,10.351 v2(38.862,10.414) 38.925,10.351 57.848,10.351 v2(57.912,10.287) 57.975,10.351 76.898,10.351 v2(76.962,10.414) v2(95.885,10.414) v2(115.443,10.414) v2(134.747,10.414) 140.42,16.087 140.42,89.838 139.327,90.931 56.26,90.931 v1(55.626,90.297)
  other v2: -173.355,10.16
row6: R206.2 S280.1 S281.1 S282.1 S283.1 S284.1 S285.1 S286.1 S287.1 S288.1 S289.1 S291.1 | length 626.8
  Top Layer w0.35: S291.1@-196.263,0 -200.152,3.889 -200.152,9.779 -198.12,11.811 v2(-192.278,11.811) ; S289.1@-156.163,0 -152.781,3.382 v2@-152.781,8.636 ; S288.1@-127.587,0 -123.317,4.27 v2@-123.317,8.636 ; v2@-109.474,8.636 -109.474,3.699 S287.1@-105.775,0 ; S286.1@-79.962,0 -77.216,2.746 v2(-77.216,8.509) ; S285.1@-37.1,0 -32.829,4.27 v2@-32.829,8.636 ; S284.1@1,0 5.271,4.27 v2@5.271,8.636 ; S283.1@39.132,0 43.402,4.27 v2@43.402,8.636 ; R206.2@54.498,91.059 54.518,91.079 55.312,91.079 v1(55.332,91.099) ; S282.1@81.963,0 83.947,1.984 v2@83.947,8.509 ; S281.1@105.775,0 109.855,4.08 v2(109.855,8.509) ; S280.1@129.587,0 131.064,0 v2(136.271,5.207)
  Bottom Layer w0.35: v2(-192.278,11.811) -183.896,11.811 -181.61,9.525 -175.387,9.525 -172.974,7.112 -171.831,7.112 -170.434,8.509 -169.865,8.509 -169.825,8.549 -157.581,8.549 -157.541,8.509 v2(-152.908,8.509) -152.86,8.461 -123.238,8.461 -123.19,8.509 -123.126,8.445 -109.474,8.445 -77.279,8.445 v2(-77.216,8.509) -77.153,8.445 -33.02,8.445 -32.956,8.509 -32.908,8.461 -31.805,8.461 -31.629,8.636 132.842,8.636 v2(136.271,5.207) 140.97,9.906 140.97,90.066 139.555,91.481 55.794,91.481 55.537,91.224 55.525,91.224 55.4,91.099 v1(55.332,91.099)
  other v2: -109.474,8.255 83.947,8.255 -123.317,8.382 -32.829,8.382 5.271,8.382 43.402,8.382
SWCLK: U301.37
SWDIO: U301.34
VCC: C305.2 Q301.2 U302.3 | length 7.4
  Top Layer w0.254: C305.2@21.336,99.075 22.788,99.075 U302.3@22.803,99.06 23.028,99.06 23.176,98.912 23.176,98.687 24.581,97.282 26.158,97.282 26.871,96.569 27.096,96.569 27.244,96.421 Q301.2@27.244,96.196
VCC3V3: C306.2 C307.2 C308.2 C309.2 C310.2 C311.2 C312.2 C401.2 C402.2 C403.1 CON302.2 R306.1 R316.1 U301.1 U301.9 U301.24 U301.36 U301.48 U302.2 U401.16 U402.16 U403.7 | length 164.4
  Top Layer w0.203: U403.7@34.544,90.99 34.544,92.446 34.91,92.812 C311.2@34.91,92.837 34.91,92.862 35.208,93.16 35.233,93.16 35.912,93.839 35.912,93.936 C403.1@36.21,94.234 36.21,94.209 36.508,93.911 36.533,93.911 38.242,92.202 38.991,92.202 39.578,92.789 39.641,92.789 U301.24@39.672,92.758 ; U301.36@43.561,86.783 44.323,86.021 C310.2@44.323,84.836
  Top Layer w0.254: C401.2@-21.575,96.139 -21.575,96.114 C401.2@-21.336,95.875 ; U401.16@-21.336,94.361 C401.2@-21.336,95.875 ; v1(-11.303,94.869) -11.303,95.631 ; C402.2@-7.747,91.836 -7.704,91.879 v1(-6.836,91.879) U402.16@-5.969,91.879 ; v1(3.175,95.25) 2.667,95.758 -9.886,95.758 -10.013,95.631 -11.303,95.631 ; v1(6.096,95.123) 6.731,94.488 15.367,94.488 20.889,100.01 U302.2@25.203,100.01 ; R306.1@19.812,107.681 19.812,106.037 20.447,105.402 CON302.2@20.447,105.283 22.479,103.251 24.257,103.251 25.203,102.305 U302.2@25.203,100.01 ; v1(33.528,96.012) 31.798,97.742 30.696,97.742 30.678,97.759 30.292,97.759 R316.1@30.274,97.742 30.274,97.757 28.746,99.285 28.746,99.31 28.473,99.583 C307.2@28.448,99.583 C306.2@26.924,99.583 25.725,99.583 25.576,99.732 25.576,99.862 25.428,100.01 U302.2@25.203,100.01 ; C310.2@44.211,84.836 44.484,84.563 44.484,84.421 45.339,83.566 46.355,83.566 48.266,85.477 49.238,85.477 49.488,85.227 51.858,85.227 52.108,85.477 54.87,85.477 57.015,87.622 57.015,88.398 56.261,89.152 56.261,91.061 55.364,91.958 53.303,91.958 52.963,92.298 52.963,92.412 52.827,92.549 C308.2@52.554,92.549 ; C312.2@45.817,100.485 45.834,100.467 45.834,100.081 45.744,99.991 45.744,99.211 46.502,98.453 46.502,98.072 46.221,97.791 v1(46.221,97.75) ; v1@46.287,97.494 47.238,96.544 47.238,96.149 47.137,96.048 47.137,96.028 46.708,95.599 U301.9@46.708,95.586 ; U301.48@49.536,90.672 49.791,90.417 49.821,90.417 50.077,90.672 51.172,90.672 C309.2@51.181,90.663 51.206,90.663 51.479,90.936 51.479,91.087 51.628,91.236 51.741,91.236 51.933,91.428 51.933,91.953 52.392,92.412 52.417,92.412 C308.2@52.554,92.549 ; U301.1@49.536,92.758 50.123,93.345 v1(50.546,93.345) 52.055,93.345 52.392,93.008 52.417,93.008 52.69,92.735 C308.2@52.69,92.71 52.69,92.685 C308.2@52.554,92.549 ; C401.2@-21.336,95.875 -21.302,95.841 -21.277,95.841 -21.067,95.631 -11.303,95.631
  Bottom Layer w0.254: v1(-11.303,94.869) -8.313,91.879 v1(-6.836,91.879) ; v1(3.175,95.25) 3.269,95.25 3.396,95.123 v1(6.096,95.123) ; v1(33.528,96.012) 35.814,93.726 v1(37.084,93.726) ; v1(38.862,91.948) 38.862,91.44 42.325,87.977 48.188,87.977 48.26,87.905 48.758,87.905 49.795,86.868 51.054,86.868 52.832,88.646 52.832,92.456 51.943,93.345 v1(50.546,93.345) 50.546,95.429 48.225,97.75 v1(46.221,97.75)
pads on no net: D301.1 D301.6 S201. S202. S203. S204. S205. S206. S207. S208. S209. S210. S211. S212. S213. S214. S215. S216. S217. S218. S219. S220. S221. S222. S223. S224. S225. S226. S227. S228. S229. S230. S231. S232. S233. S234. S235. S236. S237. S238. S239. S240. S241. S242. S243. S244. S245. S246. S247. S247_2. S248. S249. S250. S251. S251_2. S252. S253. S254. S255. S256. S257. S258. S259. S260. S261. S262. S263. S263_2. S264. S264_2. S265. S265_2. S266. S267. S268. S269. S270. S271. S272. S273. S274. S275. S276. S277. S277_2. S278. S279. S280. S281. S282. S283. S284. S285. S286. S287. S288. S289. S290. S291. U301.30 U403.1 U403.5 U403.8

## Polygon pours and split planes (outlines as drawn)
GND on Int1 "Int1-No Net" (solid, remove dead copper, pour order 0): -204.127,-5.981 ccw(c-201,-5.896) -201,-9.023 139.233,-9.023 139.299,-9.042 ccw(c139.299,-5.915) 142.427,-5.915 142.423,-5.883 142.423,110.671 ccw(c139.295,110.671) 139.295,113.798 -200.974,113.798 -201.032,113.812 ccw(c-201.032,110.685) -204.159,110.685
GND on Int2 "Int2-No Net" (solid, remove dead copper, pour order 1): -204.127,-5.981 ccw(c-201,-5.896) -201,-9.023 139.233,-9.023 139.299,-9.042 ccw(c139.299,-5.915) 142.427,-5.915 142.423,-5.883 142.423,110.671 ccw(c139.295,110.671) 139.295,113.798 -200.974,113.798 -201.032,113.812 ccw(c-201.032,110.685) -204.159,110.685
GND on Bottom Layer "Bottom Layer-No Net" (solid, remove dead copper, pour order 2): -204.127,-5.981 ccw(c-201,-5.896) -201,-9.023 139.233,-9.023 139.299,-9.042 ccw(c139.299,-5.915) 142.427,-5.915 142.423,-5.883 142.423,110.671 ccw(c139.295,110.671) 139.295,113.798 -200.974,113.798 -201.032,113.812 ccw(c-201.032,110.685) -204.159,110.685
GND on Top Layer "Top Layer-No Net" (solid, remove dead copper, pour order 3): -204.127,-5.981 ccw(c-201,-5.896) -201,-9.023 139.233,-9.023 139.299,-9.042 ccw(c139.299,-5.915) 142.427,-5.915 142.423,-5.883 142.423,110.671 ccw(c139.295,110.671) 139.295,113.798 -200.974,113.798 -201.032,113.812 ccw(c-201.032,110.685) -204.159,110.685

## Silkscreen, mask and mechanical layers (free items; w line width, h text height)
Top Overlay:
  text "BL/RESET" at 18.887,102.707 h0.75
Bottom Overlay:
  lines w1: -128.71,71.641 ccw(c-123.826,76.2) -118.935,71.647 ; 115.385,16.232 ccw(c121.443,19.05) 126.333,14.497
Top Solder:
  drawing of 2 lines, arcs and shapes, not listed
  text "ClassyTKL EC" at -67.818,-4.445 h3
  text "Rev A1" at -64.008,-6.731 h3
Bottom Solder:
  drawing of 2 lines, arcs and shapes, not listed
  text "ClassyTKL EC" at -50.546,-4.572 h3
  text "Rev A1" at -55.372,-6.985 h3
outline:
  lines w0.203: -52.991,85.4 -52.984,85.393
  lines w0.254: -204.032,-5.896 -204.032,110.685 cw(c-201.032,110.685) -201.032,113.685 ; -204,-5.896 ccw(c-201,-5.896) -201,-8.896 139.299,-8.896 ; -201.032,113.671 139.295,113.671 cw(c139.295,110.671) 142.295,110.671 142.295,-5.915 ; 139.299,-8.915 ccw(c139.299,-5.915) 142.299,-5.915
Mechanical 2:
  drawing of 189 lines, arcs and shapes, not listed
Mechanical 13:
  lines w0.254: -204.032,-5.896 -204.032,110.685 cw(c-201.032,110.685) -201.032,113.685 ; -204,-5.896 ccw(c-201,-5.896) -201,-8.896 139.299,-8.896 ; -201.032,113.671 139.295,113.671 cw(c139.295,110.671) 142.295,110.671 142.295,-5.915 ; 139.299,-8.915 ccw(c139.299,-5.915) 142.299,-5.915

## Dimensions
-204.032,110.685 to 142.295,110.671 on top dimensions
139.295,113.671 to 139.299,-8.896 on top dimensions
139.299,-8.896 to 139.295,113.671 on bot dimensions
142.295,110.671 to -204.032,110.685 on bot dimensions